# Altium PCB CW313.PcbDoc (part 1 of 2)
Units mil, origin at the board's own origin, x right, y up, seen from the top; angles counter-clockwise.
Board outline 4415 x 2690 mil, 4 copper layers (Top Layer, Int1 (GND), Int2 (PWR), Bottom Layer), stack 53.912 mil thick; 81 components, 75 nets, 407 pads, 94 vias.
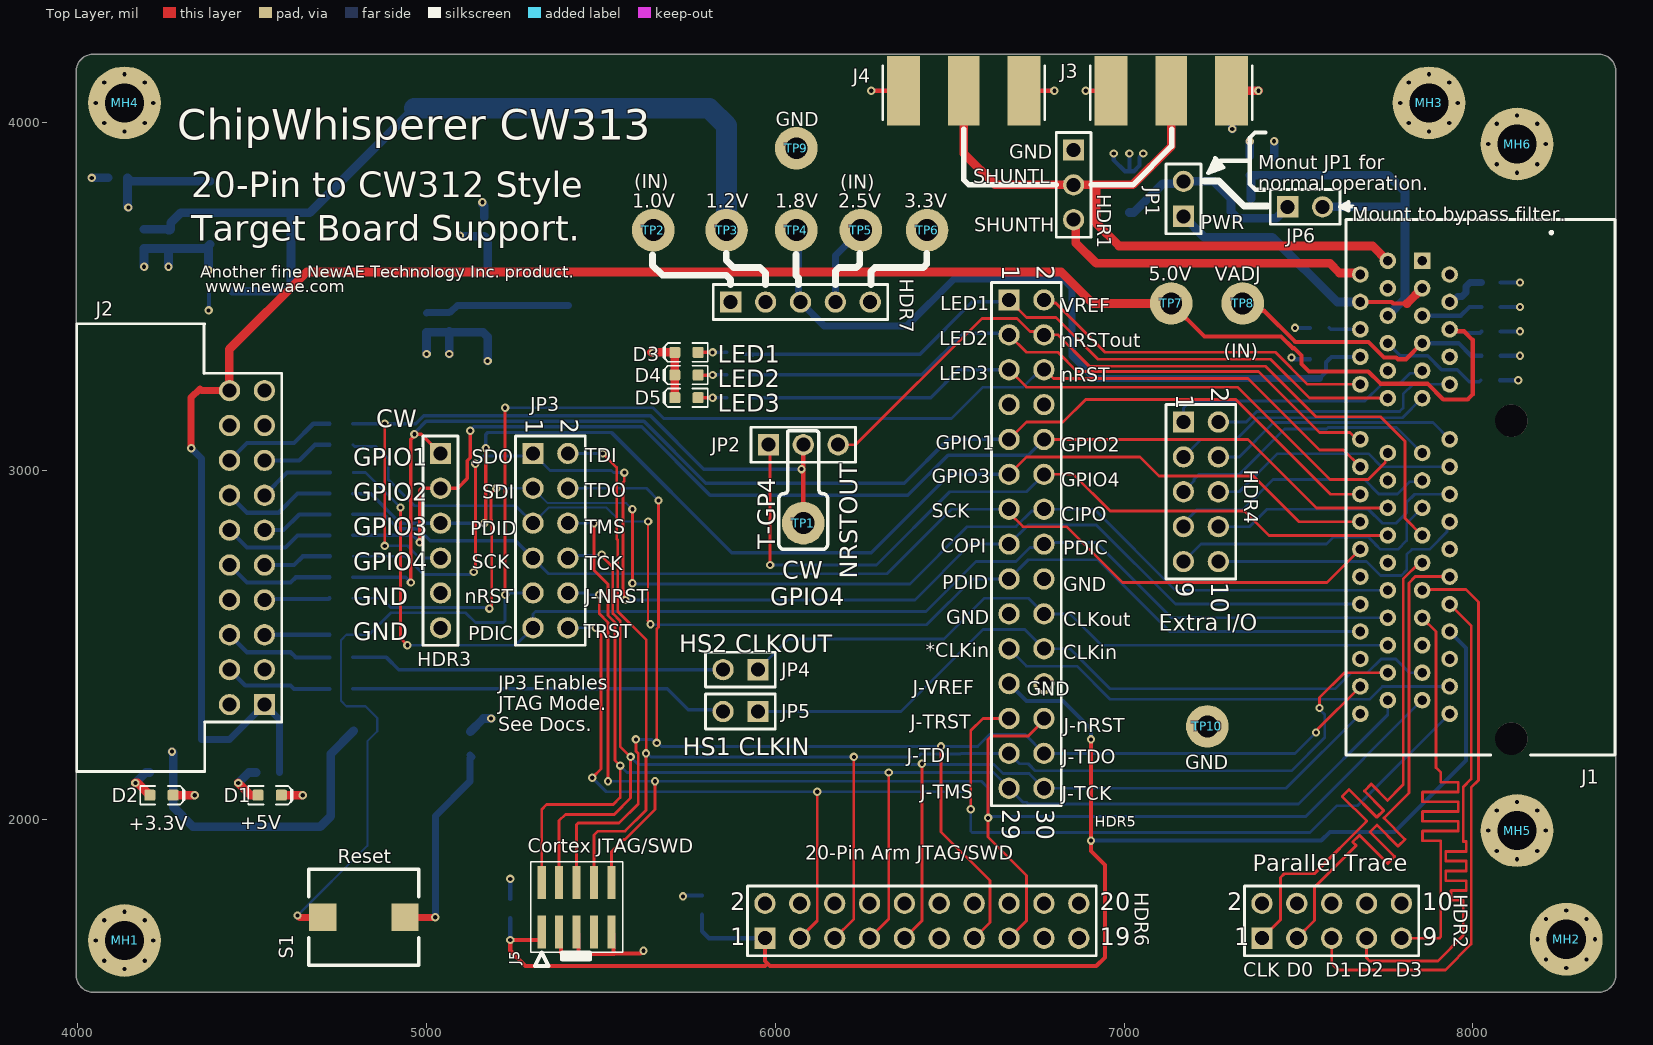
[diagram p0: Top Layer view]
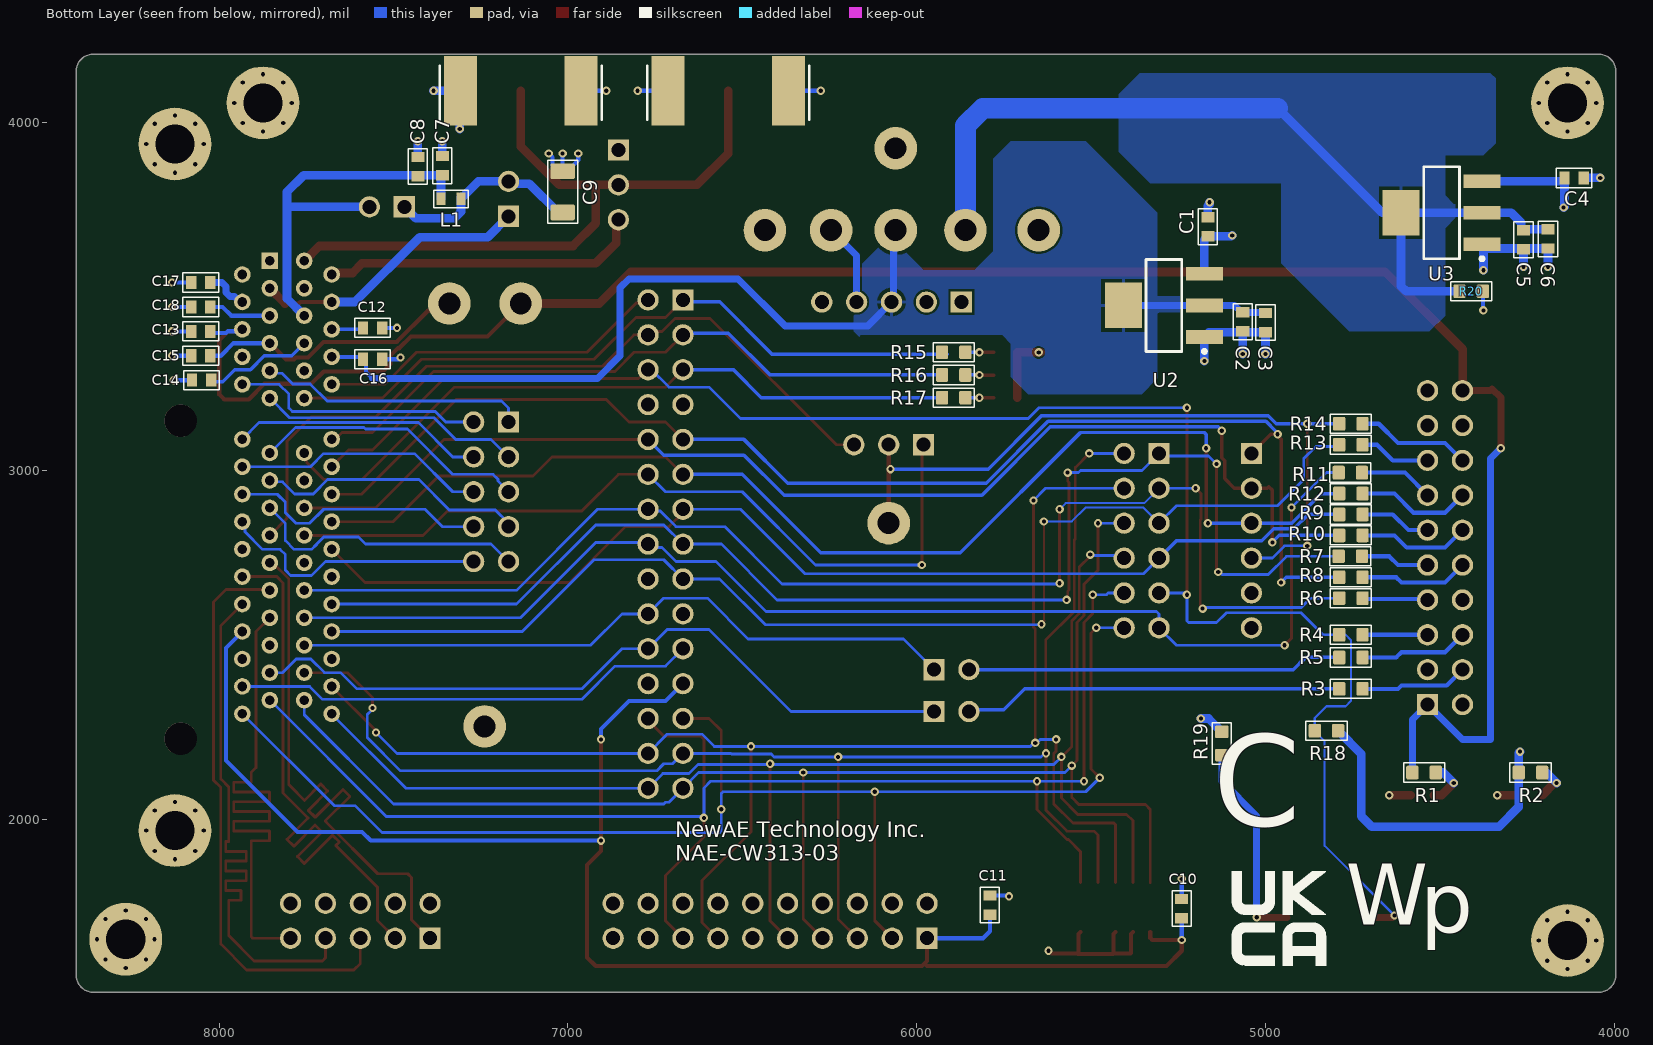
[diagram p1: Bottom Layer view, seen from below]
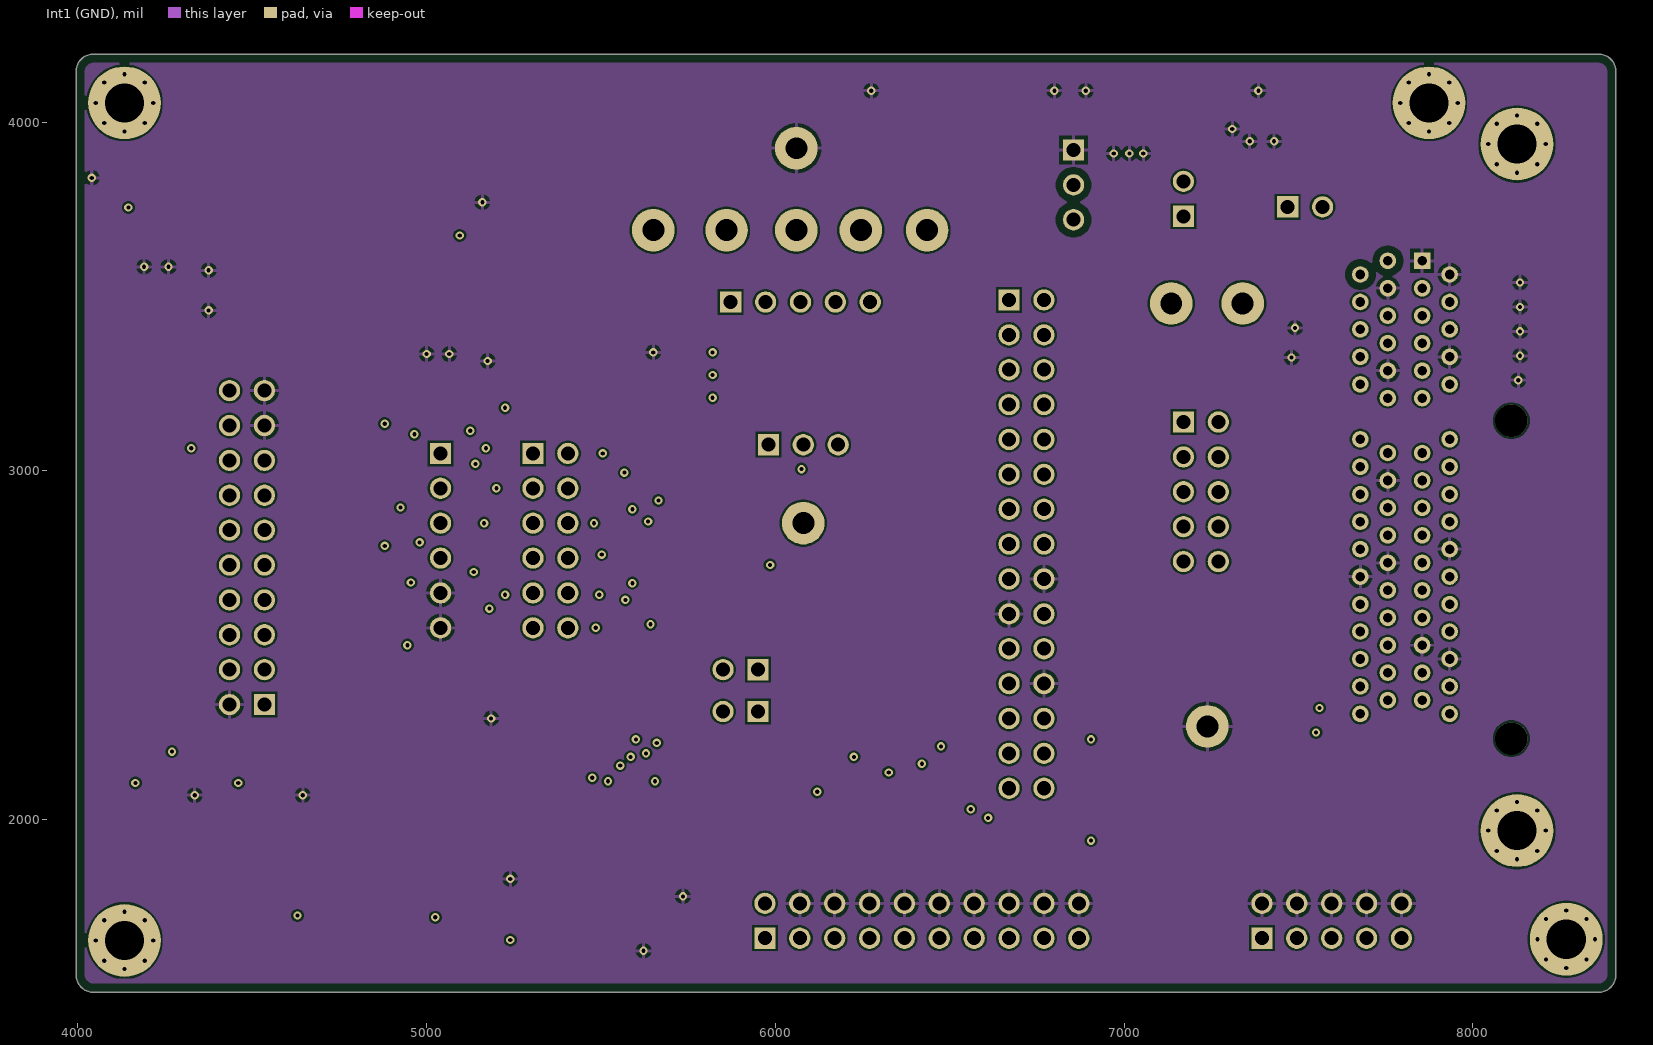
[diagram p2: Int1 (GND)]
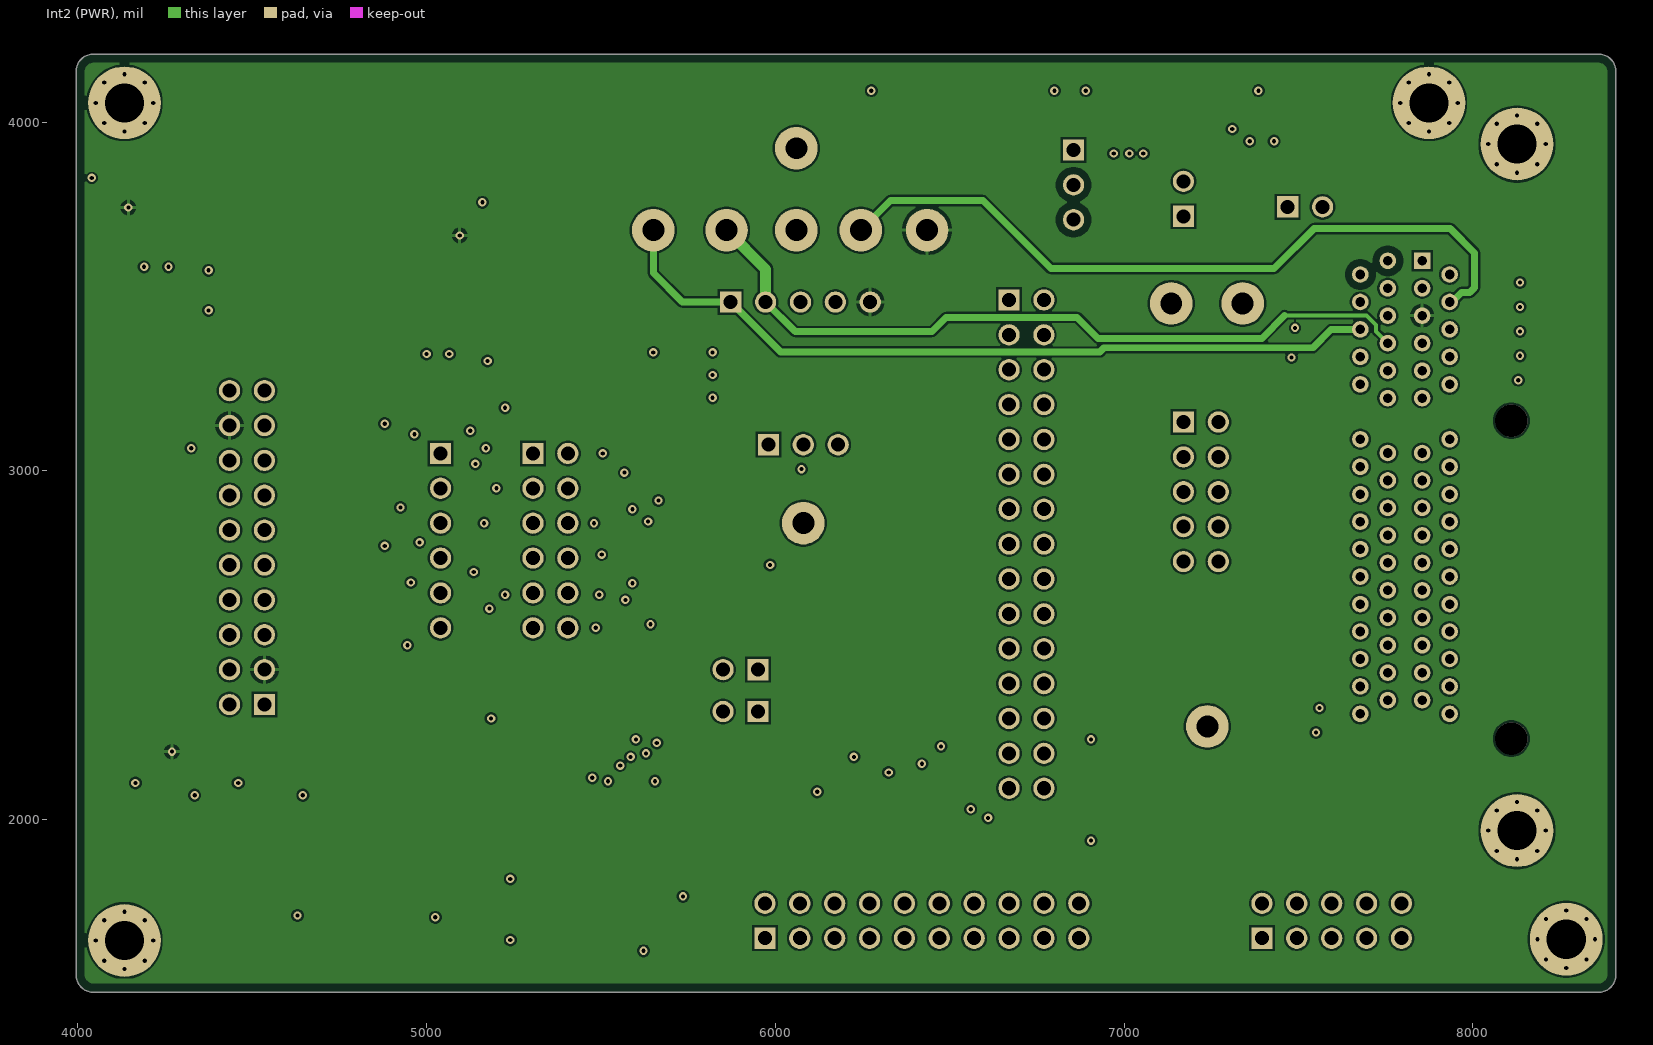
[diagram p3: Int2 (PWR)]
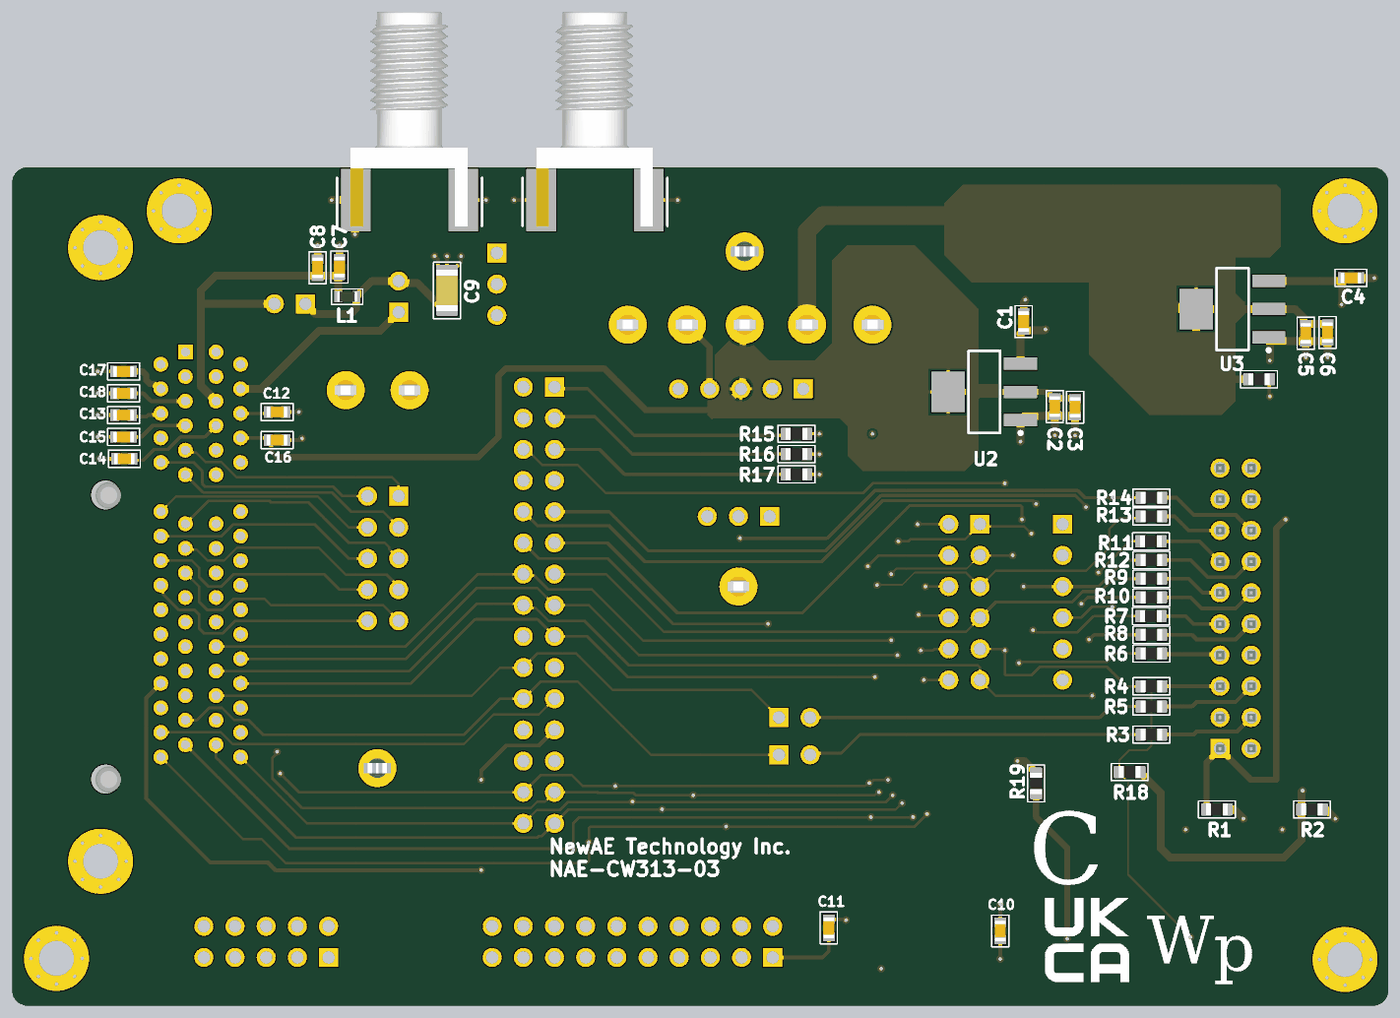
[diagram p4: 3D render of the assembled board from below, using the file's embedded part models]

## Layer stack, top to bottom
Top Solder: solder mask 1, SM-001, Dk 4
Top Layer: signal copper 1.378
Dielectric 1: prepreg 5.1, PP-017, Dk 4.3
Dielectric 2: prepreg 5.1, PP-017, Dk 4.3
Int1 (GND): signal copper 1.378
Dielectric 3: core 28, Core-039, Dk 4.8
Int2 (PWR): signal copper 1.378
Dielectric 4: prepreg 5.1, PP-017, Dk 4.3
Dielectric 5: prepreg 5.1, PP-017, Dk 4.3
Bottom Layer: signal copper 1.378
Bottom Solder: solder mask 1, SM-001, Dk 4

## Board outline
3995,1555 ccw(c4045,1555) 4045,1505 8360,1505 ccw(c8360,1555) 8410,1555 8410,4145 ccw(c8360,4145) 8360,4195 4045,4195 ccw(c4045,4145) 3995,4145

## Design rules (kind name [scope] priority, off if disabled: settings)
BoardOutlineClearance [All] p1: gap=25 ignorepadtopadclearanceinfootprint=FALSE except(0: Arc-SplitContinuation Track-SplitContinuation SMDPad-SplitContinuation THPad-SplitContinuation Via-SplitContinuation Fill-SplitContinuation Poly-SplitContinuation Region-SplitContinuation Text-SplitContinuation)
Clearance Clearance_SHUNT [InNet('SHUNTL') or InNet('SHUNTH')] p1: gap=6 ignorepadtopadclearanceinfootprint=FALSE except(0: Arc-Hole Track-Hole SMDPad-Hole THPad-Hole Via-Hole Fill-Hole Poly-Hole Region-Hole Text-Hole; 20: Arc-Fill Arc-Poly Arc-Region Track-Fill Track-Poly Track-Region SMDPad-Fill SMDPad-Poly SMDPad-Region THPad-Fill THPad-Poly THPad-Region)
Clearance [All] p2: gap=6 ignorepadtopadclearanceinfootprint=FALSE except(0: Arc-Hole Track-Hole SMDPad-Hole THPad-Hole Via-Hole Fill-Hole Poly-Hole Region-Hole Text-Hole)
PolygonConnect [All] p1: connectstyle=Relief reliefconductorwidth=10 reliefentries=4 polygonreliefangle="90 Angle" airgapwidth=10
RoutingVias [All] p1: holewidth=12 width=24 viastyle="Through Hole" minholewidth=12 minwidth=24 maxholewidth=28 maxwidth=50
SilkToSolderMaskClearance [IsPad] p1: minsilkscreentomaskgap=2 clearancetoexposedcopper=TRUE
SolderMaskExpansion [All] p1: expansion=4 istentingtop=FALSE
Width [All] p1: maxlimit=150 minlimit=6 preferedwidth=10 minimp=50.000000 maximp=50.000000 favimp=50.000000
29 further rules are at their usual default settings.

## Classes and differential pairs
component class "CW313 Front Page": MH1 MH2 MH3 MH4
component class "CW313 Power Supplies": C1 C2 C3 C4 C5 C6 C12 C13 C14 C15 C16 C17 C18 HDR7 R20 TP2 TP3 TP4 TP5 TP6 TP7 TP8 TP9 TP10 U2 U3
component class "CW313 PCIe Edge": C7 C8 C9 C10 C11 HDR1 HDR2 HDR3 HDR4 HDR5 HDR6 J1 J3 J4 J5 JP1 JP2 JP3 JP4 JP5 JP6 L1
component class "CW313 20 Pin Connector": D1 D2 D3 D4 D5 J2 R1 R2 R3 R4 R5 R6 R7 R8 R9 R10 R11 R12 R13 R14 R15 R16 R17 R18 R19 S1 TP1

## Components (designator, comment, footprint, x,y, rotation, side; value= is the part's Value field where it differs from the comment)
C1 "2u2" CAPC0603_M 5165,3700 r90 bottom
C2 "100n" CAPC0603_M 5065,3427.44 r270 bottom
C3 "2u2" CAPC0603_M 5000,3425 r270 bottom
C4 "2u2" CAPC0603_M 4115,3840 r180 bottom
C5 "100n" CAPC0603_M 4260,3662.56 r270 bottom
C6 "2u2" CAPC0603_M 4190,3665 r270 bottom
C7 "2u2" CAPC0603_M 7360,3875 r90 bottom
C8 "2u2" CAPC0603_M 7430,3872.44 r90 bottom
C9 "10u" CAPC1206_M 7015,3800 r90 bottom
C10 "100n" CAPC0603_M 5240,1745 r90 bottom
C11 "100n" CAPC0603_M 5790,1755 r90 bottom
C12 "2u2" CAPC0603_M 7560,3410 r180 bottom
C13 "2u2" CAPC0603_M 8052.44,3400 r0 bottom
C14 "2u2" CAPC0603_M 8050,3260 r0 bottom
C15 "2u2" CAPC0603_M 8052.44,3330 r0 bottom
C16 "2u2" CAPC0603_M 7560,3320 r180 bottom
C17 "2u2" CAPC0603_M 8052.44,3540 r0 bottom
C18 "2u2" CAPC0603_M 8052.44,3470 r0 bottom
D1 "LED, 0603, Green" LED-0603-GREEN 4550,2070 r0 top
D2 "LED, 0603, Green" LED-0603-GREEN 4240,2070 r0 top
D3 "LED, 0603, Green" LED-0603-GREEN 5745,3339.68 r180 top
D4 "LED, 0603, Red" LED-0603-RED 5745,3274.68 r180 top
D5 "LED, 0603, Red" LED-0603-RED 5745,3209.68 r180 top
HDR1 "Header 3" HDR1X3 6855,3920 r270 top
HDR2 "Header 5X2" HDR2X5 7395,1660 r0 top
HDR3 "Header 6" HDR1X6 5040,3050 r270 top
HDR4 "Header 5X2" HDR2X5 7170,3140 r270 top
HDR5 "Header 15X2" HDR2X15 6670,3490 r270 top
HDR6 "Header 10X2" HDR2X10 5970,1660 r0 top
HDR7 "Header 5" HDR1X5 5872,3484 r0 top
J1 "SAMTECH PCIE-064-02-X-D-RA" SAMTEC_PCIE-064-02-X-D-RA 8021.65,2952.76 r90 top locked
J2 "N2520-5002RB" NAE-PCB-CW-1000-0001-01 4535,2330 r90 top
J3 "CON-SMA-PCBEDGE-003.062" CON-SMAM-PCB-EDGE062 7135,4090 r90 top
J4 "CON-SMA-PCBEDGE-003.062" CON-SMAM-PCB-EDGE062 6540,4090 r90 top
J5 "10 Pin Cortex Program & Debug" 0.5mm_SMD_Header_5x2 5330,1678.27 r90 top
JP1 "Header 2" HDR1X2 7170,3730 r90 top
JP2 "Header 3" HDR1X3 5980,3075 r0 top
JP3 "Header 6X2" HDR2X6 5305,3050 r270 top
JP4 "Header 2" HDR1X2 5950,2430 r180 top
JP5 "Header 2" HDR1X2 5950,2310 r180 top
JP6 "Header 2" HDR1X2 7469,3757 r0 top
L1 "600-Ohm/0.5A" IND_0603 7335,3780 r180 bottom value=600R/0.5A
MH1 "4-40 MH, Tight Fit" MOUNT_#4_TIGHT 4133.86,1653.54 r90 top
MH2 "4-40 MH, Tight Fit" MOUNT_#4_TIGHT 8267.72,1657.01 r90 top
MH3 "4-40 MH, Tight Fit" MOUNT_#4_TIGHT 7874.02,4055.12 r90 top
MH4 "4-40 MH, Tight Fit" MOUNT_#4_TIGHT 4133.86,4055.12 r90 top
MH5 "4-40 MH, Tight Fit" MOUNT_#4_TIGHT 8126.38,1968.5 r90 top
MH6 "4-40 MH, Tight Fit" MOUNT_#4_TIGHT 8126.38,3937.01 r90 top
R1 "Thick Film" RESC1608X55N 4545,2135 r0 bottom value=1K
R2 "Thick Film" RESC1608X55N 4240,2135 r0 bottom value=1K
R3 "Thick Film" RESC1608X55N 4755,2375 r0 bottom value=22R
R4 "Thick Film" RESC1608X55N 4755,2530 r180 bottom value=22R
R5 "Thick Film" RESC1608X55N 4755,2465 r0 bottom value=22R
R6 "Thick Film" RESC1608X55N 4755,2635 r180 bottom value=22R
R7 "Thick Film" RESC1608X55N 4756.54,2755 r180 bottom value=22R
R8 "Thick Film" RESC1608X55N 4755,2695 r0 bottom value=22R
R9 "Thick Film" RESC1608X55N 4755,2875 r180 bottom value=22R
R10 "Thick Film" RESC1608X55N 4755,2815 r0 bottom value=22R
R11 "Thick Film" RESC1608X55N 4756.54,2995 r180 bottom value=22R
R12 "Thick Film" RESC1608X55N 4755,2935 r0 bottom value=22R
R13 "Thick Film" RESC1608X55N 4755,3075 r180 bottom value=22R
R14 "Thick Film" RESC1608X55N 4755,3135 r0 bottom value=22R
R15 "1k" RESC1608X55N 5893.62,3340 r180 bottom
R16 "1k" RESC1608X55N 5893.62,3275 r180 bottom
R17 "1k" RESC1608X55N 5893.62,3210 r180 bottom
R18 "10k" RESC1608X55N 4825,2255 r0 bottom
R19 "100R" RESC1608X55N 5125,2218.46 r90 bottom
R20 "120R" RESC1608X55N 4410,3515 r180 bottom
S1 "EVP-ASDC1A" EVPAS 4820,1720 r180 top
TP1 "5008" KEYSTONE5008 6080,2850 r0 top
TP2 "5005" KEYSTONE5008 5650,3690 r0 top
TP3 "5005" KEYSTONE5008 5860,3690 r0 top
TP4 "5005" KEYSTONE5008 6060,3690 r0 top
TP5 "5005" KEYSTONE5008 6245,3690 r0 top
TP6 "5005" KEYSTONE5008 6435,3690 r0 top
TP7 "5005" KEYSTONE5008 7135,3480 r0 top
TP8 "5005" KEYSTONE5008 7340,3480 r0 top
TP9 "5011" KEYSTONE5011 6060,3925 r0 top
TP10 "5011" KEYSTONE5011 7238.48,2267.36 r0 top
U2 "LD1117S18TR" SOT-223_M 5291.14,3474.45 r0 bottom
U3 "LD1117S12TR" SOT-223_M 4495,3740 r0 bottom

## Footprints (in the part's own frame and the unit in brackets; to place one, negate y for a bottom-side part, rotate by r counter-clockwise, add the part's x,y. Pads: shape width x height; smd on the part's side, far side on the other; paste and mask are expansions set on the pad)
0.5mm_SMD_Header_5x2 [mm]
  rect 2.4x0.6 smd: 1(0,0) 2(3.6,0) 3(0,-1.27) 4(3.6,-1.27) 5(0,-2.54) 6(3.6,-2.54) 8(3.6,-3.81) 9(0,-5.08) 10(3.6,-5.08)
  rect 2.4x0.6 smd paste-10 mask-10: 7(0,-3.81)
  silkscreen extent -2.5,-5.9 5.1,0.8, body extent -1.12,-5.71 4.72,0.64, height 6.11
CAPC0603_M [mm]
  rect 0.75x0.95 smd: 1(-0.7,0) 2(0.7,0)
  silkscreen extent -1.3,-0.7 1.3,0.7, body extent -0.85,-0.45 0.85,0.45, height 0.9
CAPC1206_M [mm] "Chip Capacitor, Body 3.2x1.6mm, 1.0mm H, EIA 1206, IPC Medium Density"
  round 0.508 on Mech15: 0(0,0)
  rrect25% 1.15x1.8 smd: 1(-1.5,0) 2(1.5,0)
  silkscreen extent -2.3,-1.1 2.3,1.1, body extent -1.7,-0.9 1.7,0.9, height 1
CON-SMAM-PCB-EDGE062 [mm] "Connector, SMA Edge Mount for 0.062\" Thick Board, 5-Lead"
  rect 5.08x2.29 smd: 1(0,0)
  rect 5.08x2.415 smd: 2(0,-4.383) 5(0,4.383)
  rect 5.08x2.415 smd far side: 3(0,-4.383) 4(0,4.383)
  silkscreen extent -2.1,-5.9 1.8,5.9, body extent -2.15,-4.8 15.3,4.72, height 4.34
EVPAS [mm]
  rect 2x2 smd: 1(-3,0) 2(3,0)
  silkscreen extent -4,-3.5 4,3.5, body extent -3.5,-3.05 3.5,3.05, height 5
HDR1X2 [mm] "Connector; Header; 2 Position"
  rect 1.55x1.55 hole 1.02: 1(0,0)
  round 1.55 hole 1.02: 2(2.54,0)
  silkscreen extent -1.27,-1.27 3.81,1.27
HDR1X3 [mm] "Connector; Header; 3 Position"
  rect 1.55x1.55 hole 1.02: 1(0,0)
  round 1.55 hole 1.02: 2(2.54,0) 3(5.08,0)
  silkscreen extent -1.27,-1.27 6.35,1.27
HDR1X5 [mm] "Connector; Header; 5 Position"
  rect 1.55x1.55 hole 1.02: 1(0,0)
  round 1.55 hole 1.02: 2(2.54,0) 3(5.08,0) 4(7.62,0) 5(10.16,0)
  silkscreen extent -1.27,-1.27 11.43,1.27
HDR1X6 [mm] "Connector; Header; 6 Position"
  rect 1.55x1.55 hole 1.02: 1(0,0)
  round 1.55 hole 1.02: 2(2.54,0) 3(5.08,0) 4(7.62,0) 5(10.16,0) 6(12.7,0)
  silkscreen extent -1.27,-1.27 13.97,1.27
HDR2X5 [mm] "Connector; Header; 5x2 Position"
  rect 1.55x1.55 hole 1.02: 1(0,0)
  round 1.55 hole 1.02: 2(0,2.54) 3(2.54,0) 4(2.54,2.54) 5(5.08,0) 6(5.08,2.54) 7(7.62,0) 8(7.62,2.54) 9(10.16,0) 10(10.16,2.54)
  silkscreen extent -1.27,-1.27 11.43,3.81
HDR2X6 [mm] "Connector; Header; 6x2 Position"
  rect 1.55x1.55 hole 1.02: 1(0,0)
  round 1.55 hole 1.02: 2(0,2.54) 3(2.54,0) 4(2.54,2.54) 5(5.08,0) 6(5.08,2.54) 7(7.62,0) 8(7.62,2.54) 9(10.16,0) 10(10.16,2.54) 11(12.7,0) 12(12.7,2.54)
  silkscreen extent -1.27,-1.27 13.97,3.81
HDR2X10 [mm] "Connector; Header; 10x2 Position"
  rect 1.55x1.55 hole 1.02: 1(0,0)
  round 1.55 hole 1.02: 2(0,2.54) 3(2.54,0) 4(2.54,2.54) 5(5.08,0) 6(5.08,2.54) 7(7.62,0) 8(7.62,2.54) 9(10.16,0) 10(10.16,2.54) 11(12.7,0) 12(12.7,2.54) 13(15.24,0) 14(15.24,2.54) 15(17.78,0) 16(17.78,2.54) 17(20.32,0) 18(20.32,2.54) 19(22.86,0) 20(22.86,2.54)
  silkscreen extent -1.27,-1.27 24.13,3.81
HDR2X15 [mm] "Connector; Header; 15x2 Position"
  rect 1.55x1.55 hole 1.02: 1(0,0)
  round 1.55 hole 1.02: 2(0,2.54) 3(2.54,0) 4(2.54,2.54) 5(5.08,0) 6(5.08,2.54) 7(7.62,0) 8(7.62,2.54) 9(10.16,0) 10(10.16,2.54) 11(12.7,0) 12(12.7,2.54) 13(15.24,0) 14(15.24,2.54) 15(17.78,0) 16(17.78,2.54) 17(20.32,0) 18(20.32,2.54) 19(22.86,0) 20(22.86,2.54) 21(25.4,0) 22(25.4,2.54) 23(27.94,0) 24(27.94,2.54) 25(30.48,0) 26(30.48,2.54) 27(33.02,0) 28(33.02,2.54) 29(35.56,0) 30(35.56,2.54)
  silkscreen extent -1.27,-1.27 36.83,3.81
IND_0603 [mm] "Chip Inductor, 2-Leads, Body 1.60x0.80mm, IPC Medium Density"
  rect 0.64x0.92 smd: 1(-0.73,0) 2(0.73,0)
  Top Layer pour cut-out: -0.686,0.457 0.838,0.457 0.838,-0.457 -0.686,-0.457
  silkscreen extent -1.27,-0.64 1.27,0.63, body extent -0.82,-0.43 0.82,0.43, height 0.9
KEYSTONE5008 [mm] "TEST POINT PC MULTI PURPOSE ORG"
  round 3.1 hole 1.6: 1(0,0)
  body extent -1.59,-1.59 1.59,1.59, height 5.47
KEYSTONE5011 [mm] "TEST POINT PC MULTI PURPOSE BLK"
  round 3.1 hole 1.6: 1(0,0)
  body extent -1.59,-1.59 1.59,1.59, height 8.13
LED-0603-GREEN [mm]
  round 0.254 on Mech15: 0(0,0)
  rrect25% 0.8x0.8 smd: A(-0.85,0) K(0.85,0)
  Top Layer pour cut-out: -0.5,0.5 0.5,0.5 0.5,-0.5 -0.5,-0.5
  silkscreen extent -1.55,-0.67 1.67,0.67, body extent -0.8,-0.4 0.8,0.4, height 0.75
LED-0603-RED [mm]
  round 0.254 on Mech15: 0(0,0)
  rrect25% 0.8x0.8 smd: A(-0.85,0) K(0.85,0)
  Top Layer pour cut-out: -0.5,0.5 0.5,0.5 0.5,-0.5 -0.5,-0.5
  silkscreen extent -1.55,-0.67 1.67,0.67, body extent -0.8,-0.4 0.8,0.4, height 0.75
MOUNT_#4_TIGHT [mil]
  round 14 hole 12: 1(-82.21,0) 1(-58.13,58.13) 1(-58.13,-58.13) 1(0,82.21) 1(0,82.21) 1(0,-82.21) 1(58.13,58.13) 1(58.13,-58.13) 1(82.21,0)
  round 208.66 hole 112.2: 1(0,0)
NAE-PCB-CW-1000-0001-01 [mm] "High Temp Terminal Body, 2x10 Pins, R/A, 2.54mm Pitch, Male"
  rect 1.55x1.55 hole 1.02: 1(0,0)
  round 1.55 hole 1.02: 2(0,2.54) 3(2.54,0) 4(2.54,2.54) 5(5.08,0) 6(5.08,2.54) 7(7.62,0) 8(7.62,2.54) 9(10.16,0) 10(10.16,2.54) 11(12.7,0) 12(12.7,2.54) 13(15.24,0) 14(15.24,2.54) 15(17.78,0) 16(17.78,2.54) 17(20.32,0) 18(20.32,2.54) 19(22.86,0) 20(22.86,2.54)
  silkscreen extent -4.87,-1.27 27.74,13.66, body extent -4.87,-0.31 27.74,13.66, height 9.27
RESC1608X55N [mm] "Chip Resistor, Body 1.6x0.8mm, EIA 0603, IPC Medium Density"
  round 0.254 on Mech15: 0(0,0)
  rrect25% 0.9x1 smd: 1(-0.85,0) 2(0.85,0)
  Top Layer pour cut-out: -0.6,0.5 0.6,0.5 0.6,-0.5 -0.6,-0.5
  silkscreen extent -1.5,-0.7 1.5,0.7, body extent -0.87,-0.47 0.88,0.48, height 0.54
SAMTEC_PCIE-064-02-X-D-RA [mm]
  rect 1.208x1.208 hole 0.7: A01(16.5,4.25)
  round 1.208 hole 0.7: A02(15.5,2.25) A03(14.5,4.25) A04(13.5,2.25) A05(12.5,4.25) A06(11.5,2.25) A07(10.5,4.25) A08(9.5,2.25) A09(8.5,4.25) A10(7.5,2.25) A11(6.5,4.25) A12(3.5,2.25) A13(2.5,4.25) A14(1.5,2.25) A15(0.5,4.25) A16(-0.5,2.25) A17(-1.5,4.25) A18(-2.5,2.25) A19(-3.5,4.25) A20(-4.5,2.25) A21(-5.5,4.25) A22(-6.5,2.25) A23(-7.5,4.25) A24(-8.5,2.25) A25(-9.5,4.25) A26(-10.5,2.25) A27(-11.5,4.25) A28(-12.5,2.25) A29(-13.5,4.25) A30(-14.5,2.25) A31(-15.5,4.25) A32(-16.5,2.25) B01(16.5,6.75) B02(15.5,8.75) B03(14.5,6.75) B04(13.5,8.75) B05(12.5,6.75) B06(11.5,8.75) B07(10.5,6.75) B08(9.5,8.75) B09(8.5,6.75) B10(7.5,8.75) B11(6.5,6.75) B12(3.5,8.75) B13(2.5,6.75) B14(1.5,8.75) B15(0.5,6.75) B16(-0.5,8.75) B17(-1.5,6.75) B18(-2.5,8.75) B19(-3.5,6.75) B20(-4.5,8.75) B21(-5.5,6.75) B22(-6.5,8.75) B23(-7.5,6.75) B24(-8.5,8.75) B25(-9.5,6.75) B26(-10.5,8.75) B27(-11.5,6.75) B28(-12.5,8.75) B29(-13.5,6.75) B30(-14.5,8.75) B31(-15.5,6.75) B32(-16.5,8.75)
  round 2.35 hole 2.35 unplated: ""(-18.3,-2.25) ""(4.85,-2.25)
  silkscreen extent -19.5,-9.8 19.5,9.8, body extent -19.53,-9.55 19.47,9.3, height 9.46
SOT-223_M [mm] "SOT223, 4-Leads, Body 6.5x3.5mm, Pitch 2.3mm, Lead Span 7mm, IPC Low Density"
  rect 2.7x1 smd: 1(-2.95,2.3) 2(-2.95,0) 3(-2.95,-2.3)
  rect 2.7x3.3 smd: 4(2.95,0)
  silkscreen extent -3.07,-3.35 1.3,3.47, body extent -1.85,-3.35 1.85,3.35, height 1.8

## Part data
C1 C3 C4 C6 C7 C8 C12 C13 C14 C15 C16 C17 C18: library part CCHIP-2u2-0603-16V, "2u2, 0603", Case-EIA=0603, Case-Metric=1608, Manufacture 1="Taiyo Yuden", Manufacture Part Number 1=EMK107BJ225KA-T, Rated Voltage=16VDC, Supplier Part Number 1=587-1430-1-ND, Component Group=Capacitor, Component Type=Standard, Mounting Technology=SMT, Part Number=CCHIP-2u2-0603-16V, Pin Count=2, Supplier 1=Digi-Key
C2 C5 C10 C11: library part CCHIP-100n-0603, "100n, 0603", Case-EIA=0603, Case-Metric=1608, Manufacture 1=Kemet, Manufacture Part Number 1=C0603C104K5RACTU, Rated Voltage=50VDC, Supplier Part Number 1=399-5089-2-ND, Component Group=Capacitor, Component Type=Standard, Mounting Technology=SMT, Part Number=CCHIP-100n-0603, Pin Count=2, Supplier 1=Digi-Key
C9: library part CCHIP-10u-1206, "CAP CER 10UF 25V X7R 1206", Case-EIA=1206, Case-Metric=3216, Manufacture 1="Taiyo Yuden", Manufacture Part Number 1=TMK316AB7106KL-T, Supplier Part Number 1=587-3486-1-ND, Component Group=Capacitor, Component Type=Standard, Mounting Technology=SMT, Part Number=CCHIP-10u-1206, Pin Count=2, Supplier 1=Digi-Key
D1 D2 D3: library part LEDCHIP_0603_GREEN, "Chip LED, Green", Manufacture 1=Kingbright, Manufacture Part Number 1=APT1608CGCK, Supplier Part Number 1=754-1116-1-ND, Component Group=Optical, Component Type=Standard, Mounting Technology=SMT, Part Number=LEDCHIP_0603_GREEN, Pin Count=2, PP Material Stack=16, PP Rotation=-90, Supplier 1=Digi-Key
D4 D5: library part LEDCHIP_0603_RED, "Chip LED, Red", Manufacture 1=Kingbright, Manufacture Part Number 1=APT1608SRCPRV, Supplier Part Number 1=754-1122-1-ND, Component Group=Optical, Component Type=Standard, Mounting Technology=SMT, Part Number=LEDCHIP_0603_RED, Pin Count=2, PP Material Stack=15, PP Rotation=-90, Supplier 1=Digi-Key
HDR1 JP2: "Header, 3-Pin", LatestRevisionDate=17-Jul-2002, LatestRevisionNote="Re-released for DXP Platform.", Publisher="Altium Limited"
HDR2 HDR4: "Header, 5-Pin, Dual row", LatestRevisionDate=17-Jul-2002, LatestRevisionNote="Re-released for DXP Platform.", Publisher="Altium Limited"
HDR3: "Header, 6-Pin", LatestRevisionDate=17-Jul-2002, LatestRevisionNote="Re-released for DXP Platform.", Publisher="Altium Limited"
HDR5: "Header, 15-Pin, Dual row", LatestRevisionDate=17-Jul-2002, LatestRevisionNote="Re-released for DXP Platform.", Publisher="Altium Limited"
HDR6: "Header, 10-Pin, Dual row", LatestRevisionDate=17-Jul-2002, LatestRevisionNote="Re-released for DXP Platform.", Publisher="Altium Limited"
HDR7: "Header, 5-Pin", LatestRevisionDate=17-Jul-2002, LatestRevisionNote="Re-released for DXP Platform.", Publisher="Altium Limited"
J1: library part PCIE-064-02-S-D-RA, "1.00 mm PCI Express Edge Card Connector (Thick Gold)", Manufacture 1=Samtech, Manufacture Part Number 1=PCIE-064-02-X-D-RA, Package=None, Availability=Unavailable, Component Group=Connector, Component Type=Standard, MF=Samtec, Mounting Technology=Through-hole, MP=PCIE-064-02-X-D-RA, Part Number=PCIE-064-02-S-D-RA, Pin Count=64, PP Material Stack=0, PP Rotation=0, PP Rotation1=0, Price=None, RoHS=Yes, Supplier 1=Mouser
J2: library part NAE-CW-1000-0001-01, "20 Pin R/A Shrouded Header", Manufacturer=3M, Supplier Part Number 1=MHE20K-ND, Temperature Range="-55 to 125 degC", Mounting Technology=Through-hole, Orientation=Vertical, PackageDescription=".100[2.54] High Temp Terminal Body (Board Stacking)", PackageReference=N2520-5002RB, PartNumber=N2520-5002RB, Pitch="2.54 mm", RoHS=True, Supplier 1=Digi-Key
J3 J4: "SMA Female Edge Mount Connector for 0.062\" Thick Board", Component Group=Connector, Component Type=Standard, ComponentLink1Description="Manufacturer URL", ComponentLink1URL=http://www.linxtechnologies.com/, ComponentLink2Description=Datasheet, ComponentLink2URL=http://www.connectorcity.com/diagrams/SMA/CONSMA003.062.pdf, Part Number=CON-SMA-PCBEDGE-003.062, Pin Count=5
J5: library part Cortex_Debug_Header_10Pin, "10 Pin Cortex Program & Debug 0.5mm pitch", Manufacture 1="Samtec Inc", Manufacture Part Number 1=FTSH-105-01-L-DV-007-K, Supplier Part Number 1=SAM9438-ND, Component Group=Connector, Component Type=Standard, Mounting Technology=SMT, Part Number=Cortex_Debug_Header_10Pin, Pin Count=10, PP Material Stack=0, PP Rotation=0, RoHS=Yes, Supplier 1=Digi-Key
JP1 JP4 JP5 JP6: "Header, 2-Pin", LatestRevisionDate=17-Jul-2002, LatestRevisionNote="Re-released for DXP Platform.", Publisher="Altium Limited"
JP3: "Header, 6-Pin, Dual row", LatestRevisionDate=17-Jul-2002, LatestRevisionNote="Re-released for DXP Platform.", Publisher="Altium Limited"
L1: library part FBCHIP-600R-0603, "600 Ohm @ 100 MHz, 0.5A rated FB", Case-EIA=0603, Case-Metric=1608, Manufacture 1="Murata Electronics", Manufacture Part Number 1=BLM18AG601SN1D, Rated Power=0.5A, Supplier Part Number 1=490-1014-2-ND, Component Group=Inductor, Component Type=Standard, Part Number=FBCHIP-600R-0603, Pin Count=2, PP Material Stack=0, PP Rotation=0, Supplier 1=Digi-Key
MH1 MH2 MH3 MH4 MH5 MH6: library part MOUNT_#4_TIGHT, "Machine screw 4-40 Mounting Hole", Component Group=Mechanical, Component Type=Mechanical, Part Number=MOUNT_#4_TIGHT, Pin Count=1, PP Material Stack=0, PP Rotation=0
R1 R2: library part RES_1K_0603_1%, "Resistor SMD chip 1k Ohm 0.1W 1% 0603", Manufacturer 1=Yageo, Manufacturer Part Number 1=RC0603FR-071KL, Package / Case="0603 (1608 Metric)", Ratings=1/10W, Supplier Part Number 1=311-1.00KHRCT-ND, Tolerance=±1%, SCDType=spec, Supplier 1=Digi-Key
R3 R4 R5 R6 R7 R8 R9 R10 R11 R12 R13 R14: library part RES_22R_0603_5%, "Resistor SMD chip 22 Ohm 0.1W 5% 0603", Case="0603 (1608 metric)", Manufacturer 1=Yageo, Manufacturer 2="Samsung Electro-Mechanics America, Inc", Manufacturer 3="Stackpole Electronics Inc", Manufacturer 4="Rohm Semiconductor", Manufacturer 5="Panasonic Electronic Components", Manufacturer Part Number 1=RC0603JR-0722RL, Manufacturer Part Number 2=RC1608J220CS, Manufacturer Part Number 3=RMCF0603JT22R0, Manufacturer Part Number 4=MCR03ERTJ220, Manufacturer Part Number 5=ERJ-3GEYJ220V, Ratings=1/10W, Supplier Part Number 1=311-22GRCT-ND, Temperature Coefficient=±100ppm/°C, Tolerance=±5%, ComponentLink1Description=http://www.yageo.com/documents/recent/PYu-RC0603_51_RoHS_L_4.pdf, ComponentLink1URL=http://www.yageo.com/documents/recent/PYu-RC0603_51_RoHS_L_4.pdf, ComponentLink2Description=http://www.samsungsem.com/servlet/FileDownload?filename=productcatalog/pdf/Chip_Resistor.pdf, ComponentLink2URL=http://www.samsungsem.com/servlet/FileDownload?filename=productcatalog/pdf/Chip_Resistor.pdf, ComponentLink3Description=http://www.seielect.com/Catalog/SEI-RMCF_RMCP.pdf, ComponentLink3URL=http://www.seielect.com/Catalog/SEI-RMCF_RMCP.pdf, ComponentLink4Description=http://rohmfs.rohm.com/en/products/databook/datasheet/passive/resistor/chip_resistor/mcr_g.pdf, ComponentLink4URL=http://rohmfs.rohm.com/en/products/databook/datasheet/passive/resistor/chip_resistor/mcr_g.pdf, ComponentLink5Description=http://industrial.panasonic.com/www-cgi/jvcr13pz.cgi?E+PZ+3+AOA0001+ERJ3GEYJ220V+7+WW, ComponentLink5URL=http://industrial.panasonic.com/www-cgi/jvcr13pz.cgi?E+PZ+3+AOA0001+ERJ3GEYJ220V+7+WW, Package / Case="0603 (1608 metric)", RoHS 1="RoHS Compliant", RoHS 2="RoHS Compliant", RoHS 3="RoHS Compliant", RoHS 4="RoHS Compliant", RoHS 5="RoHS Compliant", SCDType=spec, Supplier 1=Digi-Key, Supplier 2=Digi-Key, Supplier 3=Digi-Key, Supplier 4=Digi-Key, Supplier 5=Digi-Key, Supplier Part Number 2=1276-5022-6-ND, Supplier Part Number 3=RMCF0603JT22R0DKR-ND, Supplier Part Number 4=RHM22CGDKR-ND, Supplier Part Number 5=P22GDKR-ND
R15 R16 R17: library part RCHIP-1K-0603, "1k res, 0603, 1%, 1/10W", Case-EIA=0603, Case-Metric=1608, Manufacture 1=Yageo, Manufacture Part Number 1=RC0603FR-071KL, Rated Power=0.1W, Rated Voltage=75VDC, Supplier Part Number 1=311-1.00KHRCT-ND, Temperature Range="-55C to 155C", Tolerance=1%, Component Group=Resistor, Component Type=Standard, Mounting Technology=SMT, Part Number=RCHIP-1K-0603, Pin Count=2, Supplier 1=Digi-Key
R18: library part RCHIP-10K-0603, "10k res, 0603, 1%, 1/10W", Case-EIA=0603, Case-Metric=1608, Manufacture 1=Yageo, Manufacture Part Number 1=RC0603FR-0710KL, Rated Power=0.1W, Rated Voltage=75VDC, Supplier Part Number 1=311-10.0KHRCT-ND, Temperature Range="-55C to 155C", Tolerance=1%, Component Group=Resistor, Component Type=Standard, Mounting Technology=SMT, Part Number=RCHIP-10K-0603, Pin Count=2, Supplier 1=Digi-Key
R19: library part RCHIP-100R-0603, "100R res, 0603, 1%, 1/10W", Case-EIA=0603, Case-Metric=1608, Manufacture 1=Yageo, Manufacture Part Number 1=RC0603FR-07100RL, Rated Power=0.1W, Rated Voltage=75VDC, Supplier Part Number 1=311-100HRCT-ND, Temperature Range="-55C to 155C", Tolerance=1%, Component Group=Resistor, Component Type=Standard, Mounting Technology=SMT, Part Number=RCHIP-100R-0603, Pin Count=2, Supplier 1=Digi-Key
R20: library part RCHIP-120R-0603, "120R res, 0603, 1%, 1/10W", Case-EIA=0603, Case-Metric=1608, Manufacture 1=Yageo, Manufacture Part Number 1=RC0603FR-07120RL, Rated Power=0.1W, Rated Voltage=75VDC, Supplier Part Number 1=311-120HRCT-ND, Temperature Range="-55C to 155C", Tolerance=1%, Component Group=Resistor, Component Type=Standard, Mounting Technology=SMT, Part Number=RCHIP-120R-0603, Pin Count=2, Supplier 1=Digi-Key
S1: "Pushbutton, SMD, 2.5NM force, NO", Manufacture 1=Panasonic, Rated Power=0.1W, Rated Voltage=75VDC, Supplier Part Number 1=P16856CT-ND, Component Group=Switch, Component Type=Standard, Manufacture Part Number 1=EVP-ASDC1A, Mounting Technology=SMT, Part Number=EVP-ASDC1A, Pin Count=2, Supplier 1=Digi-Key
TP1: library part KEYSTONE_5008, "TEST POINT PC COMPACT .063\"D ORG", Supplier Part Number 1=36-5008-ND, Component Group="Test Point", Component Type=Standard, Mounting Technology=Through-hole, Part Number=KEYSTONE_5008, Pin Count=1, Supplier 1=Digi-Key
TP2 TP3 TP4 TP5 TP6 TP7 TP8: library part KEYSTONE_5005, "TEST POINT PC COMPACT .063\"D RED", Supplier Part Number 1=36-5008-ND, Component Group="Test Point", Component Type=Standard, Mounting Technology=Through-hole, Part Number=KEYSTONE_5005, Pin Count=1, Supplier 1=Digi-Key
TP9 TP10: library part KEYSTONE_5011, "TEST POINT PC MULTI PURPOSE BLK", Supplier Part Number 1=36-5011-ND, Component Group="Test Point", Component Type=Standard, Mounting Technology=Through-hole, Part Number=KEYSTONE_5011, Pin Count=1, Supplier 1=Digi-Key
U2: library part CMP-0244-00308-1, "Fixed Low Drop Positive Voltage Regulator, 1.8V, 4-Pin SOT-223, Tape and Reel", Supplier Part Number 1=497-7308-1-ND, ComponentLink1Description="Manufacturer URL", ComponentLink1URL=http://www.st.com, ComponentLink2Description=Datasheet, ComponentLink2URL=http://www.st.com/internet/com/TECHNICAL_RESOURCES/TECHNICAL_LITERATURE/DATASHEET/CD00000544.pdf, DatasheetVersion=1/11/2011, PackageDescription="4-Pin SOT-223 Package, 6.5 x 3.5 mm Body, 2.3 mm Pitch, 7 mm Lead Span", PackageReference=SOT-223, PackageVersion=2010, Supplier 1=Digi-Key
U3: library part CMP-0244-00318-1, "Fixed Low Drop Positive Voltage Regulator, 1.2V, 4-Pin SOT-223, Tape and Reel", Supplier Part Number 1=497-4240-1-ND, ComponentLink1Description="Manufacturer URL", ComponentLink1URL=http://www.st.com, ComponentLink2Description=Datasheet, ComponentLink2URL=http://www.st.com/internet/com/TECHNICAL_RESOURCES/TECHNICAL_LITERATURE/DATASHEET/CD00000544.pdf, DatasheetVersion=1/11/2011, PackageDescription="4-Pin SOT-223 Package, 6.5 x 3.5 mm Body, 2.3 mm Pitch, 7 mm Lead Span", PackageReference=SOT-223, PackageVersion=2010, Supplier 1=Digi-Key

## Via types
v1: diameter 24, hole 12, Top Layer to Bottom Layer, tented both sides, 94 vias

## Nets (pads, with @x,y where several pads share a name; then routed paths per layer and width w, separated by ;. In a path a pad name is that pad's centre, name@x,y a point inside that pad or via, vN(x,y) a via of type N, cw(c..) or ccw(c..) an arc to the next point about the centre after c; other vN are vias at no path point)
CLKIN: HDR5.22 J1.A29 JP5.1 | length 2123.9
  Bottom Layer w8: JP5.1 6360,2310 6595,2545 6715,2545 HDR5.22 6845,2490 6960,2375 7605,2375 7651.42,2421.42 7698.03,2421.42 7737.28,2460.67 7778.79,2460.67 7818.2,2421.26 J1.A29
CLKIN_n: HDR5.21 J1.A30 | length 1338.4
  Bottom Layer w8: HDR5.21 6720,2440 6865,2440 6960,2345 7703.37,2345 7740.26,2381.89 J1.A30
CLKOUT: HDR5.20 J1.B27 JP4.1 | length 1946.7
  Bottom Layer w8: JP4.1 6038.15,2518.15 6483.15,2518.15 6600,2635 6725,2635 HDR5.20 6845,2590 6935,2500 J1.B27
CLKOUT_n: J1.B28
CW_HS1: JP5.2 R3.2 | length 1088.5
  Bottom Layer w10: R3.2 5690,2375 5750,2315 5845,2315 JP5.2
CW_HS2: JP4.2 R5.2 | length 1076
  Bottom Layer w10: R5.2 4885,2465 4920,2430 JP4.2
CW_PDIC: HDR5.16 J1.B25 JP3.11 R11.1 | length 3625.8
  Top Layer w8: v1(4925,2895) 4925,2520 v1(4945,2500)
  Bottom Layer w8: R11.1 4825,2995 v1(4925,2895) ; v1(4945,2500) 5255,2500 JP3.11 5305,2590 5311.89,2596.89 6431.89,2596.89 6575,2740 6690,2740 6730.23,2780.23 6760.23,2780.23 HDR5.16 6775,2795 6920,2795 7136.26,2578.74 J1.B25
CW_PDID: HDR5.17 J1.B26 JP3.5 R13.1 | length 3506
  Top Layer w6: 5635,2570.04 v1(5635,2855)
  Top Layer w8: 5635,2570.04 5635,2569.33 5642,2562.33 v1(5642,2560)
  Bottom Layer w6: JP3.5 5350,2895 5515,2895 5555,2855 v1(5635,2855)
  Bottom Layer w8: R13.1 4793.46,3070 4855,3070 4890,3035 4890,2975 4965,2900 5255,2900 JP3.5 ; v1(5642,2560) 5643.24,2558.76 6433.76,2558.76 6565,2690 HDR5.17 6725,2745 6925,2745 7130.63,2539.37 J1.B26
FILT_HP: J1.A03 J1.B04 JP1.1 | length 806
  Top Layer w12: J1.B04 7767.14,3484.25 7771.39,3480 7810.71,3480
  Top Layer w25: 7810.71,3480 J1.A03
  Bottom Layer w25: JP1.1 7230,3670 7425,3670 7610.75,3484.25 J1.B04
FILTIN: C7.1 C8.1 J1.B05 JP6.2 L1.1 | length 1144.5
  Bottom Layer w25: C7.1 C7.1@7361.38,3847.44 ; L1.1 7363.64,3780.1 7363.64,3845.18 C7.1@7361.38,3847.44 ; JP6.2 7805,3757 ; J1.B05 7805,3493.98 7805,3757 ; C7.1@7361.38,3847.44 7757.56,3847.44 7805,3800 7805,3757
GND: C1.2 C2.2 C3.2 C4.2 C5.2 C6.2 C7.2 C8.2 C9.2 C10.2 C11.2 C12.2 C13.2 C14.2 C15.2 C16.2 C17.2 C18.2 D1.K D2.K D3.K D4.K D5.K HDR1.1 HDR2.2 HDR2.4 HDR2.6 HDR2.8 HDR2.10 HDR3.5 HDR3.6 HDR5.18 HDR5.19 HDR5.24 HDR6.4 HDR6.6 HDR6.8 HDR6.10 HDR6.12 HDR6.14 HDR6.16 HDR6.18 HDR6.20 J1.A01 J1.A02 J1.A08 J1.A20 J1.A27 J1.A28 J1.B03 J1.B09 J1.B15 J1.B21 J1.B22 J2.2 J2.17 J2.19 J3.2 J3.3 J3.4 J3.5 J4.2 J4.3 J4.4 J4.5 J5.3 J5.5 J5.9 R19.2 R20.2 TP9.1 TP10.1 U2.1 U3.1 | length 3291.2
  Top Layer w12: J5.3 5385.81,1672.46 5385.81,1617.44 5387.03,1616.22 5435.81,1616.22 ; J5.5 5435.81,1672.46 5435.81,1616.22 ; J5.9 5535.81,1672.46 5535.81,1616.19 ; v1(5622,1624) 5614.19,1616.19 5535.81,1616.19 ; v1(6275,4090) J4.5 ; J4.2 v1(6800,4090) ; v1(6890,4090) J3.5 ; 5435.81,1616.22 5437.03,1615 5537,1615 5535.81,1616.19
  Top Layer w25: D2.K v1(4335,2070) ; D1.K v1(4645,2070) ; v1@5645,3339.68 v1(5650,3339.68) D3.K D4.K D5.K ; J3.2 v1(7385,4090)
  Bottom Layer w12: v1(4375,3460) 4376.54,3461.54 R20.2 ; C10.2 v1(5240,1830) ; v1(5735,1780) 5737.56,1782.56 C11.2 ; v1(6275,4090) J4.4 ; J4.3 v1(6800,4090) ; v1(6890,4090) J3.4 ; v1(6970,3910) 6970,3891.26 7002.2,3859.06 C9.2 ; v1(7015,3910) C9.2 ; v1(7055,3910) 7044.43,3899.43 7044.43,3875.69 7027.8,3859.06 C9.2 ; v1(7480,3325) 7485,3320 C16.2 ; v1(7490,3410) C12.2 ; C14.2 v1(8130,3260) ; C15.2 v1(8135,3330) ; C13.2 v1(8135,3400) ; C18.2 v1(8135,3470) ; C17.2 v1(8135,3540)
  Bottom Layer w25: v1(4040,3840) C4.2 ; v1(4190,3585) C6.2 4366.85,3637.44 U3.1@4375,3645.59 ; v1(4260,3585) C5.2 ; v1(4375,3575) U3.1@4375,3645.59 ; U3.1 U3.1@4375,3645.59 ; v1(5000,3335) C3.2 C2.2@5065,3397.44 ; v1(5065,3335) C2.2@5065,3397.44 ; C2.2 C2.2@5065,3397.44 ; R19.2 5163.07,2290 v1(5185,2290) ; v1(5160,3770) 5160,3765 5165,3760 C1.2 ; v1(5175,3315) U2.1 5161.46,3397.44 C2.2@5065,3397.44 ; J3.3 J3.3@7310,4090 ; v1(7310,3980) J3.3@7310,4090 ; J3.3@7312.54,4115 7310,4112.46 J3.3@7310,4090 ; C7.2 v1(7360,3945) ; v1(7385,4090) J3.3@7310,4090 ; C8.2 v1(7430,3945)
GPIO1/TX: HDR3.1 HDR5.9 J1.B16 R8.2 | length 3706.6
  Top Layer w8: HDR5.9 6720,3140 6825,3140 6890,3205 7320,3205 7591.93,2933.07 J1.B16
  Top Layer w10: v1(4955,2680) 4955,3090 4965,3100 v1(4965,3105) 4985,3105 HDR3.1
  Bottom Layer w10: R8.2 4940,2695 v1(4955,2680) ; v1@4970,3111 4970,3113.63 4998.37,3142 5623.25,3142 5800.25,2965 6370,2965 6495,3090 HDR5.9
GPIO2/RX: HDR3.2 HDR5.10 J1.B17 R10.2 | length 3509.5
  Top Layer w8: HDR5.10 7355,3090 7551.3,2893.7 J1.B17
  Top Layer w10: v1(4980,2795) 4980,2945 4990,2955 4995,2950 HDR3.2 5088.83,2950 5117,2978.17 5117,3029.53 5125,3037.53 v1(5125,3115)
  Bottom Layer w10: R10.2 4960,2815 v1(4980,2795) ; v1@5124.55,3115 5135.55,3126 5616.63,3126 5812.63,2930 6380,2930 6495,3045 6725,3045 HDR5.10
GPIO3: HDR3.3 HDR5.11 J1.B18 R12.2 | length 3511.3
  Top Layer w8: HDR5.11 6720,3040 7045,3040 7100,2985 7370,2985 7500.67,2854.33 J1.B18
  Top Layer w10: v1(5165,2850) 5170,2855 v1(5170,3065)
  Bottom Layer w10: R12.2 4840,2935 4925,2850 HDR3.3 v1(5165,2850) ; v1(5170,3065) 5170,3104.14 5175.86,3110 5530,3110 5875,2765 6275,2765 6500,2990 HDR5.11
GPIO4: HDR5.12 J1.B19 JP2.1 | length 2298.2
  Top Layer w8: JP2.1 5985,3070 v1(5985,2730) ; HDR5.12 6855,2990 6960,2885 7345,2885 7415.04,2814.96 J1.B19
  Bottom Layer w8: v1(5985,2730) 6290,2730 6500,2940 6720,2940 HDR5.12
GPIO4/TRIG: HDR3.4 JP2.2 R14.2 TP1.1 | length 2108.9
  Top Layer w8: v1(4880,2785) v1(4880,3135)
  Top Layer w12: TP1.1 JP2.2
  Bottom Layer w8: v1(4880,2785) 4945,2785 4980,2750 HDR3.4
  Bottom Layer w10: R14.2 v1(4880,3135) 4968.75,3135 4991.75,3158 5642,3158 5795,3005 v1(6075,3005)
HDR1: HDR4.1 J1.A09 | length 768.8
  Bottom Layer w8: HDR4.1 7170,3180 7190,3200 7690,3200 7738.85,3248.85 7788.85,3248.85 7819.83,3279.83 7846.76,3279.83 J1.A09
HDR2: HDR4.2 J1.A10 | length 731.3
  Bottom Layer w8: HDR4.2 7350.2,3140 7380.2,3170 7790,3170 7800,3180 7800,3220 7828.03,3248.03 J1.A10
HDR3: HDR4.3 J1.A11 | length 754.2
  Bottom Layer w8: HDR4.3 7220,3090 7321.41,3090 7383.74,3152.33 7798,3152.33 J1.A11
HDR4: HDR4.4 J1.A12 | length 723.6
  Bottom Layer w8: HDR4.4 7330,3040 7428.33,3138.33 7885.29,3138.33 J1.A12
HDR5: HDR4.5 J1.A13 | length 794.1
  Bottom Layer w8: HDR4.5 7200.68,2970.68 7200.68,2976 7214.69,2990 7330,2990 7460,3120 7580,3120 7584.33,3124.33 7781.18,3124.33 J1.A13
HDR6: HDR4.6 J1.A14 | length 723.9
  Bottom Layer w8: HDR4.6 7330,2940 7439.31,3049.31 7700.69,3049.31 7738.19,3011.81 J1.A14
HDR7: HDR4.7 J1.A15 | length 779
  Bottom Layer w8: HDR4.7 7170,2850 7208.11,2888.11 7340,2888.11 7426.89,2975 7688.97,2975 7730,2933.97 7783.97,2933.97 7818.55,2968.55 7850.44,2968.55 J1.A15
HDR8: HDR4.8 J1.A16 | length 752.3
  Bottom Layer w8: HDR4.8 7360,2840 7410,2890 7700,2890 7740,2850 7780,2850 7810,2880 7810,2910 7833.07,2933.07 J1.A16
HDR9: HDR4.9 J1.A17 | length 806.2
  Bottom Layer w8: HDR4.9 7220,2790 7580,2790 7600,2810 7700,2810 7720,2790 7720,2789.47 7734.47,2775 7785,2775 7810,2800 7810,2849.37 J1.A17
HDR10: HDR4.10 J1.A18 | length 782.4
  Bottom Layer w8: HDR4.10 7695,2740 7735,2700 7795,2700 7810,2715 7810,2760 7825,2775 7875,2775 7925.5,2825.5 7925.5,2846.76 J1.A18
IOVREF: HDR5.2 J1.B10 | length 1007.4
  Top Layer w8: HDR5.2 6778.86,3481.14 6803.86,3481.14 6945,3340 7433.89,3340 7525.86,3248.03 J1.B10
JTAG_nRST: HDR5.26 HDR6.15 J1.A31 J5.10 JP3.10 | length 4373.5
  Top Layer w8: v1(5495,2645) 5495,2590.6 5520,2565.6 v1(5520,2110) ; J5.10 5530,1908 5565,1943 5569,1943 5655,2029 v1(5655,2110) ; HDR6.15 6720,1710 6720,1840 6610,1950 v1(6610,2005) 6610,2230 6620,2240 6725,2240 6770,2285 HDR5.26
  Bottom Layer w8: JP3.10 5451,2650 5456,2645 v1(5495,2645) ; v1(5520,2110) v1(5655,2110) 6590.79,2110 6610,2090.79 v1(6610,2005) 6614,2009 7520.81,2009 J1.A31
JTAG_TCK: HDR5.30 HDR6.9 J1.B32 J5.4 JP3.8 | length 3980.9
  Top Layer w8: J5.4 5380,1997 5398,2015 5538,2015 5585,2062 v1(5585,2180) 5555,2210 5555,2570.2 5534,2591.2 5534,2723.67 5502,2755.67 v1(5502,2760) ; HDR6.9 6420,1710 v1(6420,2160)
  Bottom Layer w8: JP3.8 5411.94,2756.94 5498.94,2756.94 v1(5502,2760) ; v1(5585,2180) 5607,2158 6627,2158 6652.62,2132.38 6727.62,2132.38 HDR5.30 7464.02,2090 J1.B32
JTAG_TDI: HDR5.27 HDR6.5 J1.B29 J5.8 JP3.2 | length 4397.6
  Top Layer w8: J5.8 5480,1956 5491,1967 5569,1967 5629,2027 v1@5629,2186 ; v1(5505,3050) 5545,3010 5545,2805 5548,2802 5548,2597 5630,2515 5630,2191 v1(5629,2190) v1@5629,2186 ; v1@5627,2188 v1@5629,2186 ; v1@5630,2185 v1@5629,2186 ; HDR6.5 6225,1715 v1(6225,2180) ; v1(7560,2320) 7560,2350 7631.26,2421.26 J1.B29
  Bottom Layer w8: JP3.2 v1(5505,3050) ; v1(5629,2190) 5633.33,2190 5643.33,2180 6408.89,2180 6416.89,2188 6530.65,2188 6532.65,2190 HDR5.27 6699.88,2160.12 6724.88,2160.12 6745,2140 7480,2140 7575,2235 7575,2301.06 7560,2316.06 v1(7560,2320)
JTAG_TDO: HDR5.28 HDR6.13 J1.B30 J5.6 JP3.4 | length 4358.1
  Top Layer w8: J5.6 5430,1985.31 5434.69,1990 5552,1990 5607,2045 5607,2189.11 5600,2196.11 v1(5600,2230) ; v1(5660,2220) 5660,2546.89 5665,2551.89 v1(5665,2915) ; v1(6475,2210) 6475,1965 6615,1825 6615,1705 HDR6.13 ; v1(7550,2250) 7553.06,2253.06 7553.06,2257.79 J1.B30
  Bottom Layer w8: JP3.4 5630,2950 v1(5665,2915) ; v1(5600,2230) 5645.67,2230 5655.67,2220 5664.33,2220 5674.33,2210 6580,2210 6615,2245 6715,2245 HDR5.28 7490,2190 v1(7550,2250)
JTAG_TMS: HDR5.29 HDR6.7 J1.B31 J5.2 JP3.6 | length 4233
  Top Layer w8: J5.2 5330,2029 5344,2043 5535,2043 5555,2063 v1(5555,2155) 5540,2170 5540,2565.4 5520,2585.4 5520,2675 5480,2715 v1(5480,2850) ; HDR6.7 6325,1715 v1(6325,2135)
  Bottom Layer w8: JP3.6 v1(5480,2850) ; v1(5555,2155) 5575,2135 6625,2135 HDR5.29 6710,2050 6720,2050 6725,2045 7500,2045 7755.91,2300.91 J1.B31
JTAG_TRST: HDR5.25 HDR6.3 J1.A32 JP3.12 | length 4044
  Top Layer w8: v1(5475,2120) 5500,2145 5500,2535 v1(5485,2550) ; HDR6.3 6120,1710 v1(6120,2080) ; v1(6560,2030) 6560,2255 6595,2290 HDR5.25
  Bottom Layer w8: JP3.12 v1(5485,2550) ; v1(5475,2120) 5515,2080 6555.31,2080 6560,2075.31 v1(6560,2030) 6560,1967.56 6564.69,1962.87 7532.87,1962.87 7610,2040 7669.92,2040 J1.A32
JTAG_VREF: C10.1 C11.1 HDR5.23 HDR6.1 J1.A26 J5.1 | length 4773.9
  Top Layer w12: J5.1 5330,1660.81 5324.19,1655 v1(5240,1655) 5240,1624 5284,1580 5970,1580 5977.5,1587.5 ; HDR6.1 5970,1595 5977.5,1587.5 ; v1(6905,2230) v1(6905,1940) 6905,1910 6945,1870 6945,1605 6920,1580 5985,1580 5977.5,1587.5
  Bottom Layer w12: v1(5240,1655) C10.1 ; C11.1 5790,1680 5810,1660 HDR6.1 ; HDR5.23 6720,2340 6825,2340 6905,2260 v1(6905,2230) ; v1(6905,1940) 7565,1940 7590,1965 7775,1965 7980,2170 7980,2492.44 J1.A26
LED1: HDR5.1 J1.B11 R15.1 | length 2036.5
  Top Layer w8: HDR5.1 6720,3440 6805,3440 6925,3320 7420,3320 7531.34,3208.66 J1.B11
  Bottom Layer w10: R15.1@5911.73,3335 6415,3335 6565,3485 6665,3485 HDR5.1 ; R15.1 R15.1@5935.27,3331.81
LED2: HDR5.3 J1.B12 R16.1 | length 1925.9
  Top Layer w8: HDR5.3 6720,3340 6810,3340 6865,3285 7385,3285 7560,3110 7647.01,3110 7666.46,3090.55 J1.B12
  Bottom Layer w10: R16.1 6420,3275 6540,3395 6665,3395 HDR5.3
LED3: HDR5.5 J1.B13 R17.1 | length 2036.6
  Top Layer w8: HDR5.5 6720,3240 7325,3240 7590,2975 7700,2975 7748.74,3023.74 7748.74,3044.02 J1.B13
  Bottom Layer w10: R17.1@5926.3,3210 6445,3210 6525,3290 HDR5.5
MISO: HDR5.14 J1.B23 JP3.3 R6.1 | length 3737.8
  Top Layer w8: v1(5180,2605) 5187,2612 5187,2859.11 5185,2861.11 5185,2935 v1(5200,2950) ; v1(5590,2678) v1(5590,2890)
  Bottom Layer w6: JP3.3 5347.71,2907.29 5572.71,2907.29 v1(5590,2890)
  Bottom Layer w8: R6.1 4870,2635 4897.13,2607.87 5177.13,2607.87 v1(5180,2605) ; v1(5200,2950) JP3.3 ; v1(5590,2678) 5592.37,2675.63 6385.63,2675.63 6550,2840 6690,2840 6735,2885 6765,2885 HDR5.14 6915,2890 7147.52,2657.48 J1.B23
MOSI: HDR5.15 J1.B24 JP3.1 R7.1 | length 3803.1
  Top Layer w8: v1(5135,2710) 5140,2715 v1(5140,3020) ; v1(5567,2995) 5567,2970.5 5563.5,2967 5563.5,2658 5567,2654.5 5567,2633 v1(5570,2630)
  Bottom Layer w8: R7.1 4940,2755 4992,2703 5123.67,2703 5130.67,2710 v1(5135,2710) ; v1(5140,3020) 5163,3043 5298,3043 JP3.1 5353.88,3001.12 5529.55,3001.12 5535.67,2995 v1(5567,2995) ; v1(5570,2630) 6400,2630 6560,2790 HDR5.15 6725,2845 6920,2845 7146.89,2618.11 J1.B24
NetC9_1: C9.1 JP1.2 JP6.1 L1.2 | length 573.5
  Bottom Layer w25: C9.1 7027.8,3740.94 7110.34,3823.48 7163.48,3823.48 JP1.2 7256.26,3830 7300.65,3785.61 7306.16,3785.61 7306.26,3785.51 L1.2 7306.36,3779.9 7306.36,3742.64 7325,3724 7436,3724 JP6.1
NetD1_A: D1.A R1.1 | length 135
  Top Layer w25: v1(4460,2105) 4495,2070 D1.A
  Bottom Layer w25: v1(4460,2105) 4490,2135 R1.1
NetD2_A: D2.A R2.1 | length 110
  Top Layer w25: v1(4165,2105) 4171.54,2105 D2.A
  Bottom Layer w25: v1(4165,2105) 4195,2135 R2.1
NetD3_A: D3.A R15.2 | length 81.7
  Top Layer w10: D3.A v1(5820,3339.68)
  Bottom Layer w10: v1@5820,3340 R15.2
NetD4_A: D4.A R16.2 | length 81.7
  Top Layer w10: D4.A v1(5820,3274.68)
  Bottom Layer w10: v1@5820,3275 R16.2
NetD5_A: D5.A R17.2 | length 81.7
  Top Layer w10: D5.A v1(5820,3209.68)
  Bottom Layer w10: v1@5820,3210 R17.2
NetJ2_4: J2.4 R3.1 | length 309.3
  Bottom Layer w12: J2.4 4480,2385 4610,2385 4620,2375 R3.1
NetJ2_5: J2.5 R4.2 | length 186.5
  Bottom Layer w12: J2.5 R4.2
NetJ2_6: J2.6 R5.1 | length 313.5
  Bottom Layer w12: J2.6 4485,2480 4610,2480 4625,2465 R5.1
NetJ2_7: J2.7 R6.2 | length 188.6
  Bottom Layer w12: J2.7 4537.5,2632.5 4719.04,2632.5 R6.2
NetJ2_9: J2.9 R7.2 | length 198.4
  Bottom Layer w12: J2.9 4620,2730 4645,2755 R7.2
NetJ2_10: J2.10 R8.1 | length 313.5
  Bottom Layer w12: J2.10 4485,2680 4610,2680 4625,2695 R8.1
NetJ2_11: J2.11 R9.2 | length 205.2
  Bottom Layer w12: J2.11 4590,2830 4635,2875 R9.2
NetJ2_12: J2.12 R10.1 | length 321.7
  Bottom Layer w12: J2.12 4485,2780 4595,2780 4630,2815 R10.1
NetJ2_13: J2.13 R11.2 | length 215
  Bottom Layer w12: J2.13 4600,2995 R11.2
NetJ2_14: J2.14 R12.1 | length 330
  Bottom Layer w12: J2.14 4485,2880 4575,2880 4630,2935 R12.1
NetJ2_15: J2.15 R13.2 | length 205.2
  Bottom Layer w12: J2.15 4635,3030 4680,3075 R13.2
NetJ2_16: J2.16 R14.1 | length 330
  Bottom Layer w12: J2.16 4485,3080 4620,3080 4675,3135 R14.1
NetR19_1: R19.1 S1.1 | length 598.8
  Top Layer w20: S1.1 v1(5025,1720)
  Bottom Layer w20: v1(5025,1720) 5025,2010 5125,2110 5125,2177.28 5127.72,2180 5130,2180 R19.1
nRST: HDR5.6 J1.B14 JP3.9 R4.1 R18.2 S1.2 | length 4881.1
  Top Layer w8: v1(5225,2645) v1(5225,3181) ; HDR5.6 6772.1,3290 6797.1,3265 7355,3265 7560,3060 7628.98,3060 J1.B14
  Top Layer w20: v1(4630,1725) 4635,1720 S1.2
  Bottom Layer w6: v1(4630,1725) 4830,1925 4830,2224.57 4858.46,2253.03 R18.2 4858.46,2291.54 4825,2325 4770,2325 4755,2340 4755,2515 4770,2530 R4.1
  Bottom Layer w8: R4.1 4835,2530 4898.02,2593.02 5111.98,2593.02 5140,2565 5220.31,2565 5225,2569.69 v1(5225,2645) 5230,2650 JP3.9 ; v1(5225,3181) 5649,3181 5680,3150 6505,3150 6595,3240 6710,3240 6760,3290 HDR5.6
nRST_OUT: HDR5.4 J1.A19 JP2.3 | length 2211.3
  Top Layer w8: JP2.3 6230,3075 6592.15,3437.15 6693.03,3437.15 6730.42,3399.77 6760.23,3399.77 HDR5.4 6810,3390 6900,3300 7405,3300 7550,3155 7735,3155 7805,3085 7805,2864.29 J1.A19
SCK: HDR5.13 J1.B20 JP3.7 R9.1 | length 3168.2
  Top Layer w8: HDR5.13 6670,2880 6710,2840 6835,2840 6995,2680 7581.58,2680 J1.B20
  Bottom Layer w8: JP3.7 5350,2705 6320,2705 6505,2890 HDR5.13
  Bottom Layer w10: R9.1 4877.37,2875 4918.37,2834 4976,2834 5010,2800 5255,2800 JP3.7
SHUNTH: HDR1.3 J1.B02 | length 922.3
  Top Layer w25: HDR1.3 6861.52,3713.48 6861.52,3653.48 6920,3595 7590,3595 7617.69,3567.31 7672.85,3567.31 J1.B02
SHUNTL: HDR1.2 J1.B01 J3.1 J4.1 | length 2008.3
  Top Layer w25: J4.1 6540,3910 6630,3820 6920,3820 ; J3.1 7135,3930 7025,3820 6920,3820 ; J1.B01 7754.52,3602.36 7711.88,3645 6985,3645 6920,3710 6920,3820
TRACECLK: HDR2.1 J1.A21 | length 1678.6
  Top Layer w8: HDR2.1 7448,1713 7448,1834 7459,1845 7545,1845 7692.93,1992.93 7695.76,1995.76 7625.05,2066.47 7644.85,2086.27 7724.38,2006.74 7744.18,2026.54 7688.67,2082.05 7708.47,2101.84 7755.16,2055.16 7796,2096 7800,2100 7800,2690 7846.22,2736.22 J1.A21
TRACED0: HDR2.3 J1.A22 | length 1676.9
  Top Layer w8: HDR2.3 7546,1711 7546,1806 7662.5,1922.5 7665.33,1925.33 7655.23,1935.43 7675.03,1955.23 7755.84,1874.42 7775.64,1894.22 7704.93,1964.93 7724.73,1984.73 7785.7,1923.75 7805.5,1943.55 7744.52,2004.52 7816.46,2076.46 7816.46,2181.01 7816.46,2678.54 7834.76,2696.85 J1.A22
TRACED1: HDR2.5 J1.A23 | length 1677.8
  Top Layer w8: HDR2.5 7595,1588 7614,1569 7921,1569 7995,1643 7995,2092 8016,2113 8016,2624 7980,2660 7856.85,2660 J1.A23
TRACED2: HDR2.7 J1.A24 | length 1676.9
  Top Layer w8: HDR2.7 7695,1604 7704,1595 7900,1595 7972,1667 7972,1706 7972,1769 7936.95,1769 7936.95,1797 7981,1797 7981,1825 7922,1825 7922,1853 7981,1853 7981,1881 7922,1881 7922,1909 7981,1909 7981,1937 7972,1937 7972,1941 7972,2093 7995,2116 7995,2556.18 J1.A24
TRACED3: HDR2.9 J1.A25 | length 1668.2
  Top Layer w8: HDR2.9 7903.31,1660 7908,1664.69 7908,1935.26 7908,1939.26 7855.17,1939.26 7855.17,1967.26 7958,1967.26 7958,1995.26 7855.17,1995.26 7855.17,2023.26 7958,2023.26 7958,2051.26 7855.17,2051.26 7855.17,2079.26 7958,2079.26 7958,2107.26 7908,2107.26 7908,2133.76 7908,2135 7894,2149 7894,2539.07 J1.A25
VCC1.0: C12.1 HDR7.1 J1.B06 TP2.1 | length 2361.6
  Int2 (PWR) w20: TP2.1 5650,3567 5733,3484 HDR7.1 6014.59,3341.41 6930.92,3341.41 6942.5,3353 7540.95,3353 7593.46,3405.51 J1.B06
  Bottom Layer w10: C12.1 7592.05,3405.51 J1.B06
VCC1.2: C5.1 C6.1 C14.1 HDR7.2 J1.B07 R20.1 TP3.1 U3.2 U3.4 | length 5026.2
  Int2 (PWR) w12: 7460,3445 7695,3445 7722.05,3417.95 7722.05,3400 J1.B07
  Int2 (PWR) w20: HDR7.2 6057,3399 6449,3399 6489.76,3439.76 6865.24,3439.76 6925,3380 7395,3380 7460,3445
  Int2 (PWR) w31.5: TP3.1 5972,3578 HDR7.2
  Bottom Layer w10: J1.B07 7792.05,3330 7870,3330 7910,3290 7955,3290 7990,3255 8017.44,3255 C14.1
  Bottom Layer w25: C6.1 C5.1@4257.56,3692.56 ; C5.1 4263.94,3690.12 4266.2,3692.38 4266.2,3711.2 4295,3740 U3.2 U3.4 ; R20.1 4596.5,3515 4611.14,3529.64 U3.4 ; 4965,4040 4665,3740 U3.4
  Bottom Layer w59.06: 4965,4040 5810,4040 5860,3990 TP3.1
VCC1.8: C2.1 C3.1 C16.1 HDR7.3 J1.B08 TP4.1 U2.2 U2.4 | length 2594.9
  Bottom Layer w12: 7560,3265 7578.8,3283.8 7578.8,3311.24 C16.1 7594.33,3326.77 J1.B08
  Bottom Layer w20: C3.1 5001.22,3453.78 5063.78,3453.78 C2.1 5068.94,3455 5088.39,3474.45 U2.2 U2.4 ; TP4.1 6066,3684 6066,3490 HDR7.3 6140,3416 6378,3416 6512,3550 6825,3550 6850,3525 6850,3330 6915,3265 7560,3265 ; J1.B08@7673.78,3323.39 J1.B08
VCC2.5: C17.1 HDR7.4 J1.A04 TP5.1 | length 2612.3
  Int2 (PWR) w20: TP5.1 6330,3775 6595,3775 6790,3580 ; 6900,3580 6790,3580 ; J1.A04 7940.53,3484.25 7967.13,3510.86 7990.86,3510.86 8005,3525 8005,3625 7935,3695 7545,3695 7430,3580 6790,3580
  Bottom Layer w20: HDR7.4 6172,3617 TP5.1 ; J1.A04 7940.53,3484.25 7956.28,3500 7968.28,3500 7980,3511.72 7980,3528.28 7991.72,3540 C17.1
VCC3.3: C1.1 C4.1 C18.1 HDR7.5 J1.A05 J2.3 J2.18 R2.2 R18.1 TP6.1 U2.3 U3.3 | length 1609.7
  Bottom Layer w12: J1.A05 7964.88,3444.88 7990,3470 C18.1
  Bottom Layer w25: v1(4145,3755) 4142.56,3757.44 C4.1 4152.01,3830.55 U3.3 ; v1(4270,2195) 4273.46,2191.54 R2.2 4273.46,2036.54 4330,1980 4695,1980 4725,2010 4725,2188.46 R18.1 ; v1(5095,3675) 5097.56,3672.44 C1.1 5175,3662.44 U2.3
VCC5.0: C13.1 J1.A06 J2.1 J2.20 R1.2 TP7.1 | length 5829
  Top Layer w12: TP7.1 7230,3385 7450,3385 7483.27,3351.73 7487.21,3351.73 7508.6,3330.34 7508.6,3306.4 7530,3285 7700,3285 7735,3250 7870,3250 7915,3205 7985,3205 7999.29,3219.29 7999.29,3375.71 7974.85,3400.15 7938.43,3400.15 J1.A06
  Top Layer w20: v1(4325,3065) 4325,3210 4350,3235 4355,3230 J2.20
  Top Layer w25: J2.20 4434.36,3230.64 4434.36,3348.36 4656,3570 6820,3570 6910,3480 TP7.1
  Bottom Layer w12: J1.A06 7938.43,3400.15 7974.85,3400.15 7980,3395 8019.88,3395 C13.1
  Bottom Layer w20: v1(4325,3065) 4355,3035 4355,2230 4435,2230 J2.1 4578.46,2286.54 R1.2
VCCADJ: C15.1 J1.A07 TP8.1 | length 785.2
  Top Layer w12: TP8.1 7361.06,3458.94 7401.51,3458.94 7490.72,3369.73 7700.27,3369.73 7745,3325 7780,3325 7785,3320 7808.19,3320 J1.A07
  Bottom Layer w12: J1.A07 7958.86,3366.14 7995,3330 C15.1
pads on no net: C9.0 D1.0 D2.0 D3.0 D4.0 D5.0 HDR5.7 HDR5.8 HDR6.2 HDR6.11 HDR6.17 HDR6.19 J1. J2.8 J5.7 MH1.1 MH2.1 MH3.1 MH4.1 MH5.1 MH6.1 R1.0 R2.0 R3.0 R4.0 R5.0 R6.0 R7.0 R8.0 R9.0 R10.0 R11.0 R12.0 R13.0 R14.0 R15.0 R16.0 R17.0 R18.0 R19.0 R20.0

## Polygon pours and split planes (outlines as drawn)
GND on Int1 (GND) "GND_L02_P004" (solid, pour order 4): 3960,4340 4025,4405 8515,4405 8515,1260 8435,1180 8255,1360 3880,1360
VCC3.3 on Int2 (PWR) "VCC3.3_L03_P005" (solid, pour order 5): 3970,4315 3995,4340 8535,4340 8535,1440 8435,1340 8380,1395 3860,1395
VCC1.8 on Bottom Layer "VCC1.8_L04_P007" (solid, pour order 7): 5245,3500 5310,3500 5310,3740 5515,3945 5730,3945 5780,3895 5780,3630 5835,3575 5980,3575 6055,3650 6100,3650 6180,3570 6180,3400 6165,3385 6160,3390 5755,3390 5730,3365 5730,3270 5680,3220 5355,3220 5310,3265 5310,3450 5305,3455 5245,3455
VCC1.2 on Bottom Layer "VCC1.2_L04_P006" (solid, pour order 6): 4340,4125 4355,4140 5360,4140 5420,4080 5420,3915 5330,3825 4955,3825 4955,3595 4760,3400 4530,3400 4485,3445 4485,3695 4455,3725 4455,3765 4460,3765 4485,3790 4485,3905 4375,3905 4340,3940

## Silkscreen, mask and mechanical layers (free items; w line width, h text height)
Top Overlay:
  lines w10: 6010,2790 ccw(c6025,2790) 6025,2775 6030,2775 6135,2775 ccw(c6135,2790) 6150,2790 6150,2920 ccw(c6135,2920) 6135,2935 cw(c6135,2945) 6125,2945 6125,3105 ccw(c6115,3105) 6115,3115 6060,3115 6040,3115 ccw(c6040,3110) 6035,3110 6035,2945 cw(c6025,2945) 6025,2935 ccw(c6025,2920) 6010,2920 6010,2790
  lines w11.81: 7262,3888 7275,3873 7241,3854 ; 7266.5,3879.5 7241,3854 ; 7360,3889 7276,3889 7241,3854 ; 7402,3806 7377,3806 7360,3823 7360,3955 7375,3970 7405,3970 ; 7619,3757 7643,3746 7643,3770 7619.55,3757.55 7655.14,3757.55 ; 7241,3854 7261,3897 7284,3870 7241,3854
  lines w15.75: 6540,3979 6540,3835 6555,3820 6805,3820 ; 6905,3820 7025,3820 7136,3931 7136,3979
  lines w19.68: 5648,3619 5648,3589 5676.05,3560.95 5859.05,3560.95 5871,3549 5871,3534 ; 5859,3623 5859,3604 5880.37,3582.63 5956.37,3582.63 5972,3567 5972,3534 ; 6059,3620 6059,3560 6066,3553 6066,3534 ; 6172,3534 6172,3573 6182,3583 6232,3583 6242,3593 6242,3623 ; 6274,3534 6274,3572 6285,3583 6424,3583 6434,3593 6434,3623 ; 7230,3831 7272,3831 7344,3759 7411,3759
  text "GND" at 6001.52,3987.64 h40
  text "ChipWhisperer CW313" at 4285,3920 h150
  text "GND" at 6670,3895 h40
  text "SHUNTL" at 6568,3824 h40
  text "(IN)" at 5596,3810 h40
  text "(IN)" at 6186,3809 h40
  text "Monut JP1 for / normal operation." at 7385,3805 h40
  text "1.0V" at 5590,3755 h40
  text "1.2V" at 5800,3755 h40
  text "1.8V" at 6000,3755 h40
  text "2.5V" at 6180,3755 h40
  text "3.3V" at 6370,3755 h40
  text "Mount to bypass filter." at 7654,3715 h40
  text "PWR" at 7220,3693 h40
  text "SHUNTH" at 6570,3686 h40
  text "20-Pin to CW312 Style / Target Board Support." at 4325,3635 h125
  text "5.0V" at 7070,3545 h40
  text "VADJ" at 7260,3545 h40
  text "Another fine NewAE Technology Inc. product." at 4350.94,3542.56 h60
  text "www.newae.com" at 4365,3500 h60
  text "LED1" at 6472.83,3460 h40
  text "VREF" at 6820,3455 h40
  text "LED2" at 6470.07,3360 h40
  text "nRSTout" at 6820,3355 h40
  text "(IN)" at 7285,3325 h40
  text "LED1" at 5835,3310 h50
  text "LED3" at 6470.07,3260 h40
  text "nRST" at 6820,3255 h40
  text "LED2" at 5835,3240 h50
  text "LED3" at 5835,3170 h50
  text "CW" at 4855,3125 h50
  text "GPIO1" at 6459.98,3060 h40
  text "GPIO2" at 6820,3055 h40
  text "TDI" at 5455,3025 h40
  text "SDO" at 5130,3020 h40
  text "GPIO1" at 4790,3015 h50
  text "GPIO3" at 6447.84,2965 h40
  text "GPIO4" at 6820,2955 h40
  text "TDO" at 5455,2925 h40
  text "SDI" at 5160,2920 h40
  text "GPIO2" at 4790,2915 h50
  text "SCK" at 6447.84,2865 h40